# Altium PCB Using xSignals in a High-Speed Design with CM.PcbDoc
Units mil, origin at the board's own origin, x right, y up, seen from the top; angles counter-clockwise.
Board outline 4055.12 x 2086.61 mil, 2 copper layers (Top Layer, Bottom Layer); 14 components, 11 nets, 32 pads, 2 vias.
Unrouted connection lines stored in the file: 6.
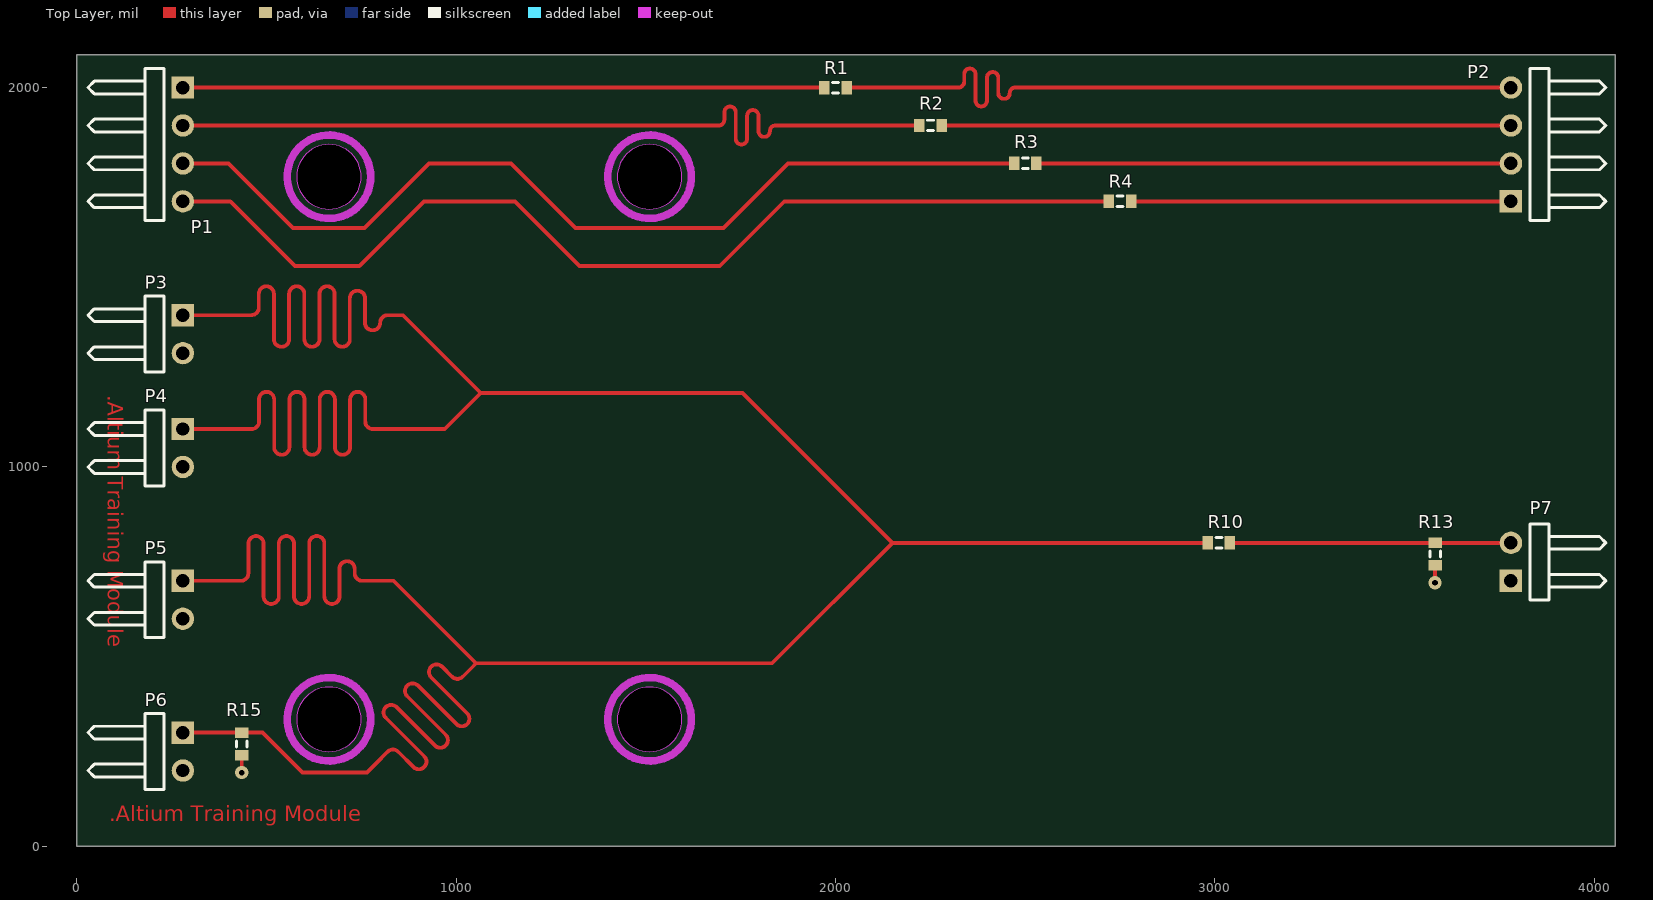
[diagram p0: Top Layer view]
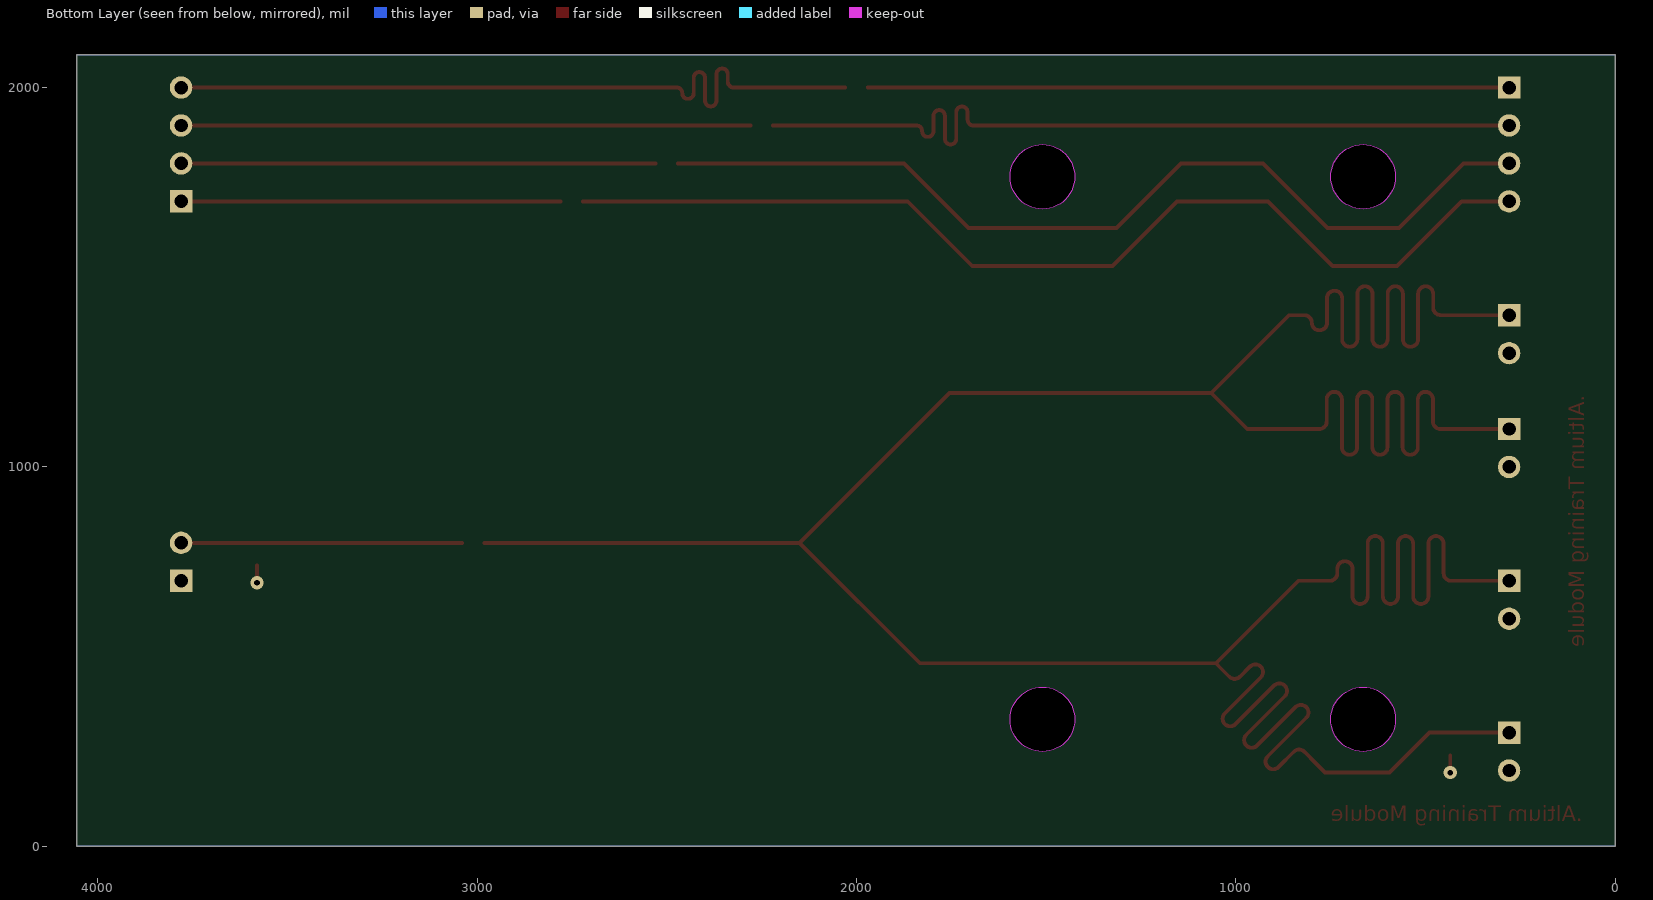
[diagram p1: Bottom Layer view, seen from below]

## Layer stack, top to bottom
Top Solder: solder mask 0.4, Solder Resist, Dk 3.5
Top Layer: signal copper 1.4
Dielectric 1: dielectric 12.6, FR-4, Dk 4.8
Bottom Layer: signal copper 1.4
Bottom Solder: solder mask 0.4, Solder Resist, Dk 3.5

## Board outline
0,0 4055.12,0 4055.12,2086.61 0,2086.61
cut-out: 579.65,334.79 ccw(c664.79,334.79) 664.79,249.65 ccw(c664.79,334.79) 749.94,334.79 ccw(c664.79,334.79) 664.79,419.94 ccw(c664.79,334.79)
cut-out: 579.65,1764.79 ccw(c664.79,1764.79) 664.79,1679.65 ccw(c664.79,1764.79) 749.94,1764.79 ccw(c664.79,1764.79) 664.79,1849.94 ccw(c664.79,1764.79)
cut-out: 1424.65,334.79 ccw(c1509.79,334.79) 1509.79,249.65 ccw(c1509.79,334.79) 1594.94,334.79 ccw(c1509.79,334.79) 1509.79,419.94 ccw(c1509.79,334.79)
cut-out: 1424.65,1764.79 ccw(c1509.79,1764.79) 1509.79,1679.65 ccw(c1509.79,1764.79) 1594.94,1764.79 ccw(c1509.79,1764.79) 1509.79,1849.94 ccw(c1509.79,1764.79)

## Design rules (kind name [scope] priority, off if disabled: settings)
AssemblyTestPointUsage [All] p1: isadvanced=TRUE
AssemblyTestpoint [All] p1: isadvanced=TRUE testpointundercomponent=TRUE minsize=40 maxsize=100 preferedsize=60 minholesize=0 maxholesize=40 preferedholesize=32 testpointgrid=1 usegrid=TRUE gridtolerance=0.01 allowsidetop=TRUE allowsidebottom=TRUE
Clearance Clearance_1 [OnMid vs OnMid] p1: gap=10 ignorepadtopadclearanceinfootprint=FALSE sourcerule=55 cellrowname=All cellrowtype=0 cellcolname=All cellcoltype=0 innerlayers=TRUE
Clearance Clearance_2 [(ExistsOnLayer('Top Layer') Or ExistsOnLayer('Bottom Layer')) vs (ExistsOnLayer('Top Layer') Or ExistsOnLayer('Bottom Layer'))] p2: gap=10 ignorepadtopadclearanceinfootprint=FALSE sourcerule=55 cellrowname=All cellrowtype=0 cellcolname=All cellcoltype=0 outerlayers=TRUE
Clearance [All] p3: gap=10 ignorepadtopadclearanceinfootprint=FALSE ismatrix=TRUE
ComponentClearance [All] p1: isadvanced=TRUE gap=10 collisioncheckmode=3 verticalgap=10 showdistances=FALSE
FabricationTestPointUsage [All] p1: isadvanced=TRUE valid=0 allowmultiple=FALSE
FabricationTestpoint [All] p1: isadvanced=TRUE side=3 testpointundercomponent=TRUE minsize=40 maxsize=100 preferedsize=60 minholesize=0 maxholesize=40 preferedholesize=32 testpointgrid=1 allowsidetop=TRUE allowsidebottom=TRUE usegrid=TRUE gridtolerance=0.01
FanoutControl Fanout_BGA [IsBGA] p1: isadvanced=TRUE bgadir=Out bgaviamode=Centered fanoutstyle=Auto fanoutdirection=Alternating viagrid=1 // Fanout_BGA (Default Rule)
FanoutControl Fanout_LCC [IsLCC] p2: isadvanced=TRUE bgadir=Out bgaviamode=Centered fanoutstyle=Auto fanoutdirection=Alternating viagrid=1 // Fanout_LCC (Default Rule)
FanoutControl Fanout_SOIC [IsSOIC] p3: isadvanced=TRUE bgadir=Out bgaviamode=Centered fanoutstyle=Auto fanoutdirection=Alternating viagrid=1 // Fanout_SOIC (Default Rule)
FanoutControl Fanout_Small [(CompPinCount < 5)] p4: isadvanced=TRUE bgadir=Out bgaviamode=Centered fanoutstyle=Auto fanoutdirection=OutThenIn viagrid=1 // Fanout_Small (Default Rule)
FanoutControl Fanout_Default [All] p5: isadvanced=TRUE bgadir=Out bgaviamode=Centered fanoutstyle=Auto fanoutdirection=Alternating viagrid=1 // Fanout_Default (Default Rule)
Height [All] p1: isadvanced=TRUE minheight=0 maxheight=1000 prefheight=500
HoleSize [All] p1: isadvanced=TRUE absolutevalues=TRUE maxlimit=100 minlimit=1 maxpercent=80.000 minpercent=20.000
HoleToHoleClearance [All] p1: isadvanced=TRUE gap=10 allowstackedmicrovias=TRUE
LayerPairs [All] p1: isadvanced=TRUE enforce=TRUE
Length Length_TJunction [InxSignalClass('T-Junction')] p1: isadvanced=TRUE maxlimit=4100 minlimit=3900
MatchedLengths "Schematic Matched Net Lengths_1" [InxSignalClass('T-Junction')] p1: tolerance=10 checknetsindiffpair=FALSE checkdiffpairvsdiffpair=TRUE checkxsignals=TRUE checkothers=TRUE
MatchedLengths "Schematic Matched Net Lengths" [InxSignalClass('Series-Term')] p2: tolerance=10 checknetsindiffpair=FALSE checkdiffpairvsdiffpair=TRUE checkxsignals=TRUE checkothers=TRUE targetsourcename=BUS4_P1-4_P2-1
MinimumSolderMaskSliver [All] p1: isadvanced=TRUE minsoldermaskwidth=10
NetAntennae [All] p1: isadvanced=TRUE netantennaetolerance=0
PasteMaskExpansion [All] p1: isadvanced=TRUE expansion=0
PlaneClearance [All] p1: isadvanced=TRUE clearance=20
PlaneConnect [All] p1: isadvanced=TRUE planeconnectstyle=Relief reliefexpansion=20 reliefentries=4 reliefconductorwidth=10 reliefairgap=10
PolygonConnect [All] p1: connectstyle=Relief reliefconductorwidth=10 reliefentries=4 polygonreliefangle="90 Angle" airgapwidth=10
RoutingCorners [All] p1: isadvanced=TRUE cornerstyle=45-Degree minsetback=100 maxsetback=100
RoutingLayers "Schematic Routing Layers_3" [InNet('BUS1')] p1: top layer_v5=TRUE bottom layer_v5=TRUE
RoutingLayers "Schematic Routing Layers_4" [InxNet('BUS1')] p2: top layer_v5=TRUE bottom layer_v5=TRUE
RoutingLayers "Schematic Routing Layers_2" [InxNet('BUS2')] p3: top layer_v5=TRUE bottom layer_v5=TRUE
RoutingLayers "Schematic Routing Layers_1" [InxNet('BUS3')] p4: top layer_v5=TRUE bottom layer_v5=TRUE
RoutingLayers "Schematic Routing Layers" [InxNet('BUS4')] p5: top layer_v5=TRUE bottom layer_v5=TRUE
RoutingLayers [All] p6: top layer_v5=TRUE bottom layer_v5=TRUE
RoutingPriority [All] p1: isadvanced=TRUE routingpriority=0
RoutingTopology "Schematic Routing Topology_5" [InNet('OBUS1')] p1: topology=Shortest
RoutingTopology RoutingTopology_1 [InNet('BUS1')] p2: topology=Shortest
RoutingTopology RoutingTopology_2 [InNet('TJUNCT')] p3: topology=Shortest
RoutingTopology RoutingTopology_3 [InNet('BUS4')] p4: topology=Shortest
RoutingTopology RoutingTopology_4 [InNet('BUS3')] p5: topology=Shortest
RoutingTopology RoutingTopology_5 [InNet('BUS2')] p6: topology=Shortest
RoutingTopology "Schematic Routing Topology_3" [InxNet('BUS1')] p7: topology=Shortest
RoutingTopology "Schematic Routing Topology_4" [InxNet('BUS2')] p8: topology=Shortest
RoutingTopology "Schematic Routing Topology_2" [InxNet('BUS3')] p9: topology=Shortest
RoutingTopology "Schematic Routing Topology_1" [InxNet('BUS4')] p10: topology=Shortest
RoutingTopology [All] p11: topology=Shortest
RoutingVias [All] p1: holewidth=28 width=50 viastyle="Through Hole" minholewidth=28 minwidth=50 maxholewidth=28 maxwidth=50
ShortCircuit [All] p1: isadvanced=TRUE allowed=FALSE
SilkToSilkClearance [All] p1: isadvanced=TRUE silktosilkclearance=10
SilkToSolderMaskClearance [IsPad] p1: isadvanced=TRUE minsilkscreentomaskgap=10 clearancetoexposedcopper=TRUE
SolderMaskExpansion [All] p1: isadvanced=TRUE expansion=4 istentingtop=FALSE
SupplyNets "Schematic Supply Nets" [InNet('GND')] p1: isadvanced=TRUE voltage=0.000
UnRoutedNet [All] p1: isadvanced=TRUE
UnpouredPolygon [All] p1: isadvanced=TRUE
Width [All] p1: maxlimit=10 minlimit=10 preferedwidth=10
2 further rules are at their usual default settings.

## Components (designator, comment, footprint, x,y, rotation, side; value= is the part's Value field where it differs from the comment)
P1 "Header 4H" HDR1X4H 280,2000 r270 top
P2 "Header 4H" HDR1X4H 3780,1700 r90 top
P3 "Header 2H" HDR1X2H 280,1400 r270 top
P4 "Header 2H" HDR1X2H 280,1100 r270 top
P5 "Header 2H" HDR1X2H 280,700 r270 top
P6 "Header 2H" HDR1X2H 280,300 r270 top
P7 "Header 2H" HDR1X2H 3780,700 r90 top
R1 "Res3" J1-0603 2000,2000 r180 top value=1K
R2 "Res3" J1-0603 2250,1900 r180 top value=1K
R3 "Res3" J1-0603 2500,1800 r180 top value=1K
R4 "Res3" J1-0603 2750,1700 r180 top value=1K
R10 "Res3" J1-0603 3010,800 r180 top value=1K
R13 "Res3" J1-0603 3580,770.47 r90 top value=1K
R15 "Res3" J1-0603 435,270 r90 top value=1K

## Footprints (in the part's own frame and the unit in brackets; to place one, negate y for a bottom-side part, rotate by r counter-clockwise, add the part's x,y. Pads: shape width x height; smd on the part's side, far side on the other; paste and mask are expansions set on the pad)
HDR1X2H [mm] "Connector; Header; 2 Position; Right Angle"
  rect 1.5x1.5 hole 0.9: 1(0,0)
  round 1.5 hole 0.9: 2(2.54,0)
  silkscreen extent -1.27,-6.35 3.81,-1.27
HDR1X4H [mm] "Connector; Header; 4 Position; Right Angle"
  rect 1.5x1.5 hole 0.9: 1(0,0)
  round 1.5 hole 0.9: 2(2.54,0) 3(5.08,0) 4(7.62,0)
  silkscreen extent -1.27,-6.35 8.89,-1.27
J1-0603 [mm] "Chip Resistor, Body 1.6x0.8mm, IPC High Density"
  rect 0.7x0.9 smd: 1(-0.75,0) 2(0.75,0)
  silkscreen extent -0.2,-0.35 0.2,0.35, body extent -0.85,-0.48 0.85,0.48, height 0.9

## Part data
P1 P2: "Header, 4-Pin, Right Angle", LatestRevisionDate=17-Jul-2002, LatestRevisionNote="Re-released for DXP Platform.", Publisher="Altium Limited"
P3 P4 P5 P6 P7: "Header, 2-Pin, Right Angle", LatestRevisionDate=17-Jul-2002, LatestRevisionNote="Re-released for DXP Platform.", Publisher="Altium Limited"
R1 R2 R3 R4 R10 R13 R15: "Resistor", LatestRevisionDate=29-May-2009, LatestRevisionNote="IPC-7351 Footprint Added.", PackageDescription="Chip Resistor", PackageReference=J1-0603, Published=8-Jun-2000, Publisher="Altium Limited"

## Via types
v1: diameter 35, hole 15, Top Layer to Bottom Layer, 2 vias

## Nets (pads, with @x,y where several pads share a name; then routed paths per layer and width w, separated by ;. In a path a pad name is that pad's centre, name@x,y a point inside that pad or via, vN(x,y) a via of type N, cw(c..) or ccw(c..) an arc to the next point about the centre after c; other vN are vias at no path point)
BUS1: P1.1 R1.2 | length 1690.5
  Top Layer w10: P1.1 1105,2000 1130,2000 1335,2000 1798,2000 R1.2
BUS2: P1.2 R2.2 | length 2217.1
  Top Layer w10: P1.2 1687,1900 1692,1900 ccw(c1692,1915) 1707,1915 1707,1935 cw(c1722,1935) 1737,1935 1737,1865 ccw(c1752,1865) 1767,1865 1767,1925.52 cw(c1782,1925.52) 1797,1925.52 1797,1885 ccw(c1812,1885) 1827,1885 cw(c1842,1885) 1842,1900 1869,1900 R2.2
BUS3: P1.3 R3.2 | length 2472.1
  Top Layer w10: P1.3 400,1800 570,1630 758.75,1630 928.75,1800 1145,1800 1315,1630 1705,1630 1875,1800 R3.2
BUS4: P1.4 R4.2 | length 2722.1
  Top Layer w10: P1.4 405,1700 575,1530 745,1530 915,1700 1155,1700 1325,1530 1695,1530 1865,1700 R4.2
GND: P3.2 P4.2 P5.2 P6.2 P7.1 R13.1 R15.1 | length 91.9
  Top Layer w10: v1(435,194.53) R15.1 ; v1(3580,695) R13.1
OBUS1: P2.4 R1.1 | length 2027.2
  Top Layer w10: R1.1 2029.66,2000.13 2319,2000.13 2324,2000.13 ccw(c2324,2015.13) 2339,2015.13 2339,2035.13 cw(c2354,2035.13) 2369,2035.13 2369,1965.13 ccw(c2384,1965.13) 2399,1965.13 2399,2025.63 cw(c2414,2025.63) 2429,2025.63 2429,1985.13 ccw(c2444,1985.13) 2459,1985.13 cw(c2474,1985.13) 2474,2000.13 2621,2000.13 3676.72,2000.13 3676.86,2000 P2.4
OBUS2: P2.3 R2.1 | length 1500.5
  Top Layer w10: R2.1 2735,1900 3041.85,1900 3695,1900 P2.3
OBUS3: P2.2 R3.1 | length 1250.5
  Top Layer w10: R3.1 3655,1800 P2.2
OBUS4: P2.1 R4.1 | length 1000.5
  Top Layer w10: R4.1 3610,1700 P2.1
TJSOURCE: P7.2 R10.1 R13.2 | length 740.5
  Top Layer w10: R10.1 R13.2 P7.2
TJUNCT: P3.1 P4.1 P5.1 P6.1 R10.2 R15.2 | length 10869.4
  Top Layer w10: P6.1 434.53,300 R15.2 435.47,300 490,300 595,195 765,195 787.53,217.53 819.35,249.35 cw(c833.49,235.21) 847.64,249.35 887.74,209.25 ccw(c901.88,223.39) 916.02,209.25 ccw(c901.88,223.39) 916.02,237.53 814.56,338.99 cw(c828.71,353.13) 814.56,367.28 cw(c828.71,353.13) 842.85,367.28 944.31,265.82 ccw(c958.45,279.96) 972.59,265.82 ccw(c958.45,279.96) 972.59,294.1 871.13,395.56 cw(c885.28,409.7) 871.13,423.84 cw(c885.28,409.7) 899.42,423.84 1000.88,322.39 ccw(c1015.02,336.53) 1029.16,322.39 ccw(c1015.02,336.53) 1029.16,350.67 934.31,445.52 cw(c948.45,459.66) 934.31,473.81 cw(c948.45,459.66) 962.59,473.81 989.06,447.34 ccw(c1003.2,461.48) 1017.34,447.34 1041.06,471.06 1052.5,482.5 ; P5.1 427.7,700 432.7,700 ccw(c432.7,720) 452.7,720 452.7,797.87 cw(c472.7,797.87) 492.7,797.87 492.7,659 ccw(c512.7,659) 532.7,659 532.7,797.87 cw(c552.7,797.87) 572.7,797.87 572.7,659 ccw(c592.7,659) 612.7,659 612.7,797.87 cw(c632.7,797.87) 652.7,797.87 652.7,659 ccw(c672.7,659) 692.7,659 692.7,731.83 cw(c712.7,731.83) 732.7,731.83 732.7,720 ccw(c752.7,720) 752.7,700 799.83,700 835,700 1052.5,482.5 ; P4.1 455.59,1100 460.59,1100 ccw(c460.59,1120) 480.59,1120 480.59,1178.02 cw(c500.59,1178.02) 520.59,1178.02 520.59,1052 ccw(c540.59,1052) 560.59,1052 560.59,1178.02 cw(c580.59,1178.02) 600.59,1178.02 600.59,1052 ccw(c620.59,1052) 640.59,1052 640.59,1178.02 cw(c660.59,1178.02) 680.59,1178.02 680.59,1052 ccw(c700.59,1052) 720.59,1052 720.59,1178.02 cw(c740.59,1178.02) 760.59,1178.02 760.59,1120 ccw(c780.59,1120) 780.59,1100 835.3,1100 970,1100 1065,1195 ; P3.1 454.88,1400 459.88,1400 ccw(c459.88,1420) 479.88,1420 479.88,1456.31 cw(c499.88,1456.31) 519.88,1456.31 519.88,1336.67 ccw(c539.88,1336.67) 559.88,1336.67 559.88,1456.31 cw(c579.88,1456.31) 599.88,1456.31 599.88,1336.67 ccw(c619.88,1336.67) 639.88,1336.67 639.88,1456.31 cw(c659.88,1456.31) 679.88,1456.31 679.88,1336.67 ccw(c699.88,1336.67) 719.88,1336.67 719.88,1444.62 cw(c739.88,1444.62) 759.88,1444.62 759.88,1380 ccw(c779.88,1380) 799.88,1380 cw(c819.88,1380) 819.88,1400 858.16,1400 860,1400 1065,1195 ; R10.2 2150,800 ; 1052.5,482.5 1832.5,482.5 2150,800 ; 1065,1195 1755,1195 2150,800

## Polygon pours and split planes (outlines as drawn)
GND on Bottom Layer "NONET_L02_P000" (solid, shelved, pour order 0): 0,2086.61 0,0 4055.12,0 4055.12,2086.61

## Keep-outs
Top Layer:
  circle w20: c665,335 r110
  circle w20: c665,1765 r110
  circle w20: c1510,335 r110
  circle w20: c1510,1765 r110

## Other copper
Top Layer:
  text ".Altium Training Module" at 81.66,1189.07 h40 r270
  text ".Altium Training Module" at 86,66.67 h40

## Silkscreen, mask and mechanical layers (free items; w line width, h text height)
Top Overlay:
  text "Altium Advanced Training: '.Pcb_File_Name_No_Path'" at 15,-261.68 h100